# EAGLE board ArduinoDinoGame (EAGLE 9.7.0)

Size 140 x 86.01 mm. Coordinates in mm from the lower left corner, seen from the top.
Outline: 0,0 140,0 140,86.01 0,86.01 0,0
Copper layers (1*16): Top 0.035mm / dielectric 1.5mm / Bottom 0.035mm
Design rules "default": minimum track width 6mil, minimum drill 0.35mm, track to track 6mil, track to pad 6mil, pad to pad 6mil, via to via 6mil, smd to smd 6mil, copper to edge 40mil, drill to drill 6mil, minimum pad ring 10mil, minimum via ring 8mil, stop-mask expansion 4mil, vias tented up to drill 0mil, thermal gap 10mil

## Footprints (pad centres in the part's own frame; a part is rotated, then mirrored left to right if it is on the bottom)
LEDRD254W60D565H860B_G = drill 0.981 pad 1.581: 1 -1.27,0; 2 1.27,0
LEDRD254W60D565H860B = drill 0.981 pad 1.581: 1 -1.27,0; 2 1.27,0
RESAD1016W63L850D250B = drill 0.83 pad 1.43: 1 -5.08,0; 2 5.08,0
SWITCH-MOMENTARY-PTH-6.5MM = drill 1.016 pad 1.88: 1 -3.251,2.261; 2 3.251,2.261; 3 -3.251,-2.261; 4 3.251,-2.261
ARDUINO-UNO-R3-SHIELD = drill 1.016 pad 1.88: 3.3V 24.13,-2.54; 5V 24.13,0; A0 24.13,12.7; A1 24.13,15.24; A2 24.13,17.78; A3 24.13,20.32; A4 24.13,22.86; A5 24.13,25.4; AREF -24.13,-13.97; D2 -24.13,20.32; D3 -24.13,17.78; D4 -24.13,15.24; D5 -24.13,12.7; D6 -24.13,10.16; D7 -24.13,7.62; D8 -24.13,3.81; D9 -24.13,1.27; D10 -24.13,-1.27; D11 -24.13,-3.81; D12 -24.13,-6.35; D13 -24.13,-8.89; GND@0 24.13,2.54; GND@1 24.13,5.08; GND@2 -24.13,-11.43; IOREF 24.13,-7.62; NC 24.13,-10.16; RES 24.13,-5.08; RX -24.13,25.4; SCL -24.13,-19.05; SDA -24.13,-16.51; TX -24.13,22.86; VIN 24.13,7.62

## Placement (x,y rotation side)
D1  GREEN  [LEDRD254W60D565H860B_G]  108.54,70.18 180 top
D2  GREEN  [LEDRD254W60D565H860B_G]  108.54,52.4 180 top
D3  RED  [LEDRD254W60D565H860B]  128.86,52.4 180 top
D4  RED  [LEDRD254W60D565H860B]  113.62,70.18 180 top
D5  RED  [LEDRD254W60D565H860B]  128.86,70.18 180 top
D6  RED  [LEDRD254W60D565H860B]  133.94,52.4 180 top
D7  RED  [LEDRD254W60D565H860B]  118.7,70.18 180 top
D8  RED  [LEDRD254W60D565H860B]  133.94,70.18 180 top
D10  RED  [LEDRD254W60D565H860B]  123.78,70.18 180 top
D11  RED  [LEDRD254W60D565H860B]  113.62,52.4 180 top
D12  RED  [LEDRD254W60D565H860B]  118.7,52.4 180 top
D14  RED  [LEDRD254W60D565H860B]  123.78,52.4 180 top
R2  10k  [RESAD1016W63L850D250B]  60.73,8.97 90 top
R3  150  [RESAD1016W63L850D250B]  80.33,49.87 0 top
R4  150  [RESAD1016W63L850D250B]  80.25,47.13 0 top
R5  150  [RESAD1016W63L850D250B]  80.17,44.7 0 top
R6  150  [RESAD1016W63L850D250B]  80.07,42.28 0 top
R7  150  [RESAD1016W63L850D250B]  89.76,52.15 0 top
R8  150  [RESAD1016W63L850D250B]  89.98,40.13 0 top
R9  150  [RESAD1016W63L850D250B]  86,67.68 0 top
R10  150  [RESAD1016W63L850D250B]  85.87,60.11 0 top
R11  150  [RESAD1016W63L850D250B]  95.16,70.85 0 top
R12  150  [RESAD1016W63L850D250B]  94.82,56.94 0 top
R13  150  [RESAD1016W63L850D250B]  85.88,62.5 0 top
R14  150  [RESAD1016W63L850D250B]  85.91,65.05 0 top
S1  SWITCH_MOMENTARY  [SWITCH-MOMENTARY-PTH-6.5MM]  63.23,19.98 90 top
U1  ARDUINO-UNO-R3-SHIELD  [ARDUINO-UNO-R3-SHIELD]  47.88,56.16 270 top

## Library data of the parts
D1 D2 = Tinkercad; CATEGORY: Opto-Electronic; SUB-CATEGORY: LED; VALUE: LED_GREEN
D3-D8 D10-D12 D14 = Tinkercad; CATEGORY: Opto-Electronic; SUB-CATEGORY: LED; VALUE: LED_RED
R2-R14 S1 U1 = Tinkercad

## Nets
D1_A: D1.1 R9.2
D2_A: D2.1 R3.2
D3_A: D3.1 R7.2
D4_A: D4.1 R14.2
D5_A: D5.1 R11.2
D6_A: D6.1 R8.2
D7_A: D7.1 R13.2
D8_A: D8.1 R12.2
D10_A: D10.1 R10.2
D11_A: D11.1 R4.2
D12_A: D12.1 R5.2
D14_A: D14.1 R6.2
U1_5V: S1.3 U1.5V
U1_A0: R2.2 S1.1 S1.2 U1.A0
U1_D2: R3.1 U1.D2
U1_D3: R4.1 U1.D3
U1_D4: R5.1 U1.D4
U1_D5: R6.1 U1.D5
U1_D6: R7.1 U1.D6
U1_D7: R8.1 U1.D7
U1_D8: R9.1 U1.D8
U1_D9: R14.1 U1.D9
U1_D10: R13.1 U1.D10
U1_D11: R10.1 U1.D11
U1_D12: R11.1 U1.D12
U1_D13: R12.1 U1.D13
U1_GND: D1.2 D2.2 D3.2 D4.2 D5.2 D6.2 D7.2 D8.2 D10.2 D11.2 D12.2 D14.2 R2.1 U1.GND@0 U1.GND@1 U1.GND@2

## Tracks (layer width: path | path; a pad name or v marks a point on that pad's centre or on a via)
D1_A  (1 unrouted)
D2_A  (1 unrouted)
D3_A  (1 unrouted)
D4_A  (1 unrouted)
D5_A  (1 unrouted)
D6_A  (1 unrouted)
D7_A  (1 unrouted)
D8_A  (1 unrouted)
D10_A  (1 unrouted)
D11_A  (1 unrouted)
D12_A  (1 unrouted)
D14_A  (1 unrouted)
U1_5V  (1 unrouted)
U1_A0  (3 unrouted)
U1_D2  (1 unrouted)
U1_D3  (1 unrouted)
U1_D4  (1 unrouted)
U1_D5  (1 unrouted)
U1_D6  (1 unrouted)
U1_D7  (1 unrouted)
U1_D8  (1 unrouted)
U1_D9  (1 unrouted)
U1_D10  (1 unrouted)
U1_D11  (1 unrouted)
U1_D12  (1 unrouted)
U1_D13  (1 unrouted)
U1_GND  (15 unrouted)